# Altium PCB PCB.PcbDoc
Units mil, origin at the board's own origin, x right, y up, seen from the top; angles counter-clockwise.
Board outline 3858.27 x 3110.24 mil, 2 copper layers (Top Layer, Bottom Layer); 65 components, 47 nets, 203 pads, 35 vias.
Unrouted connection lines stored in the file: 1.
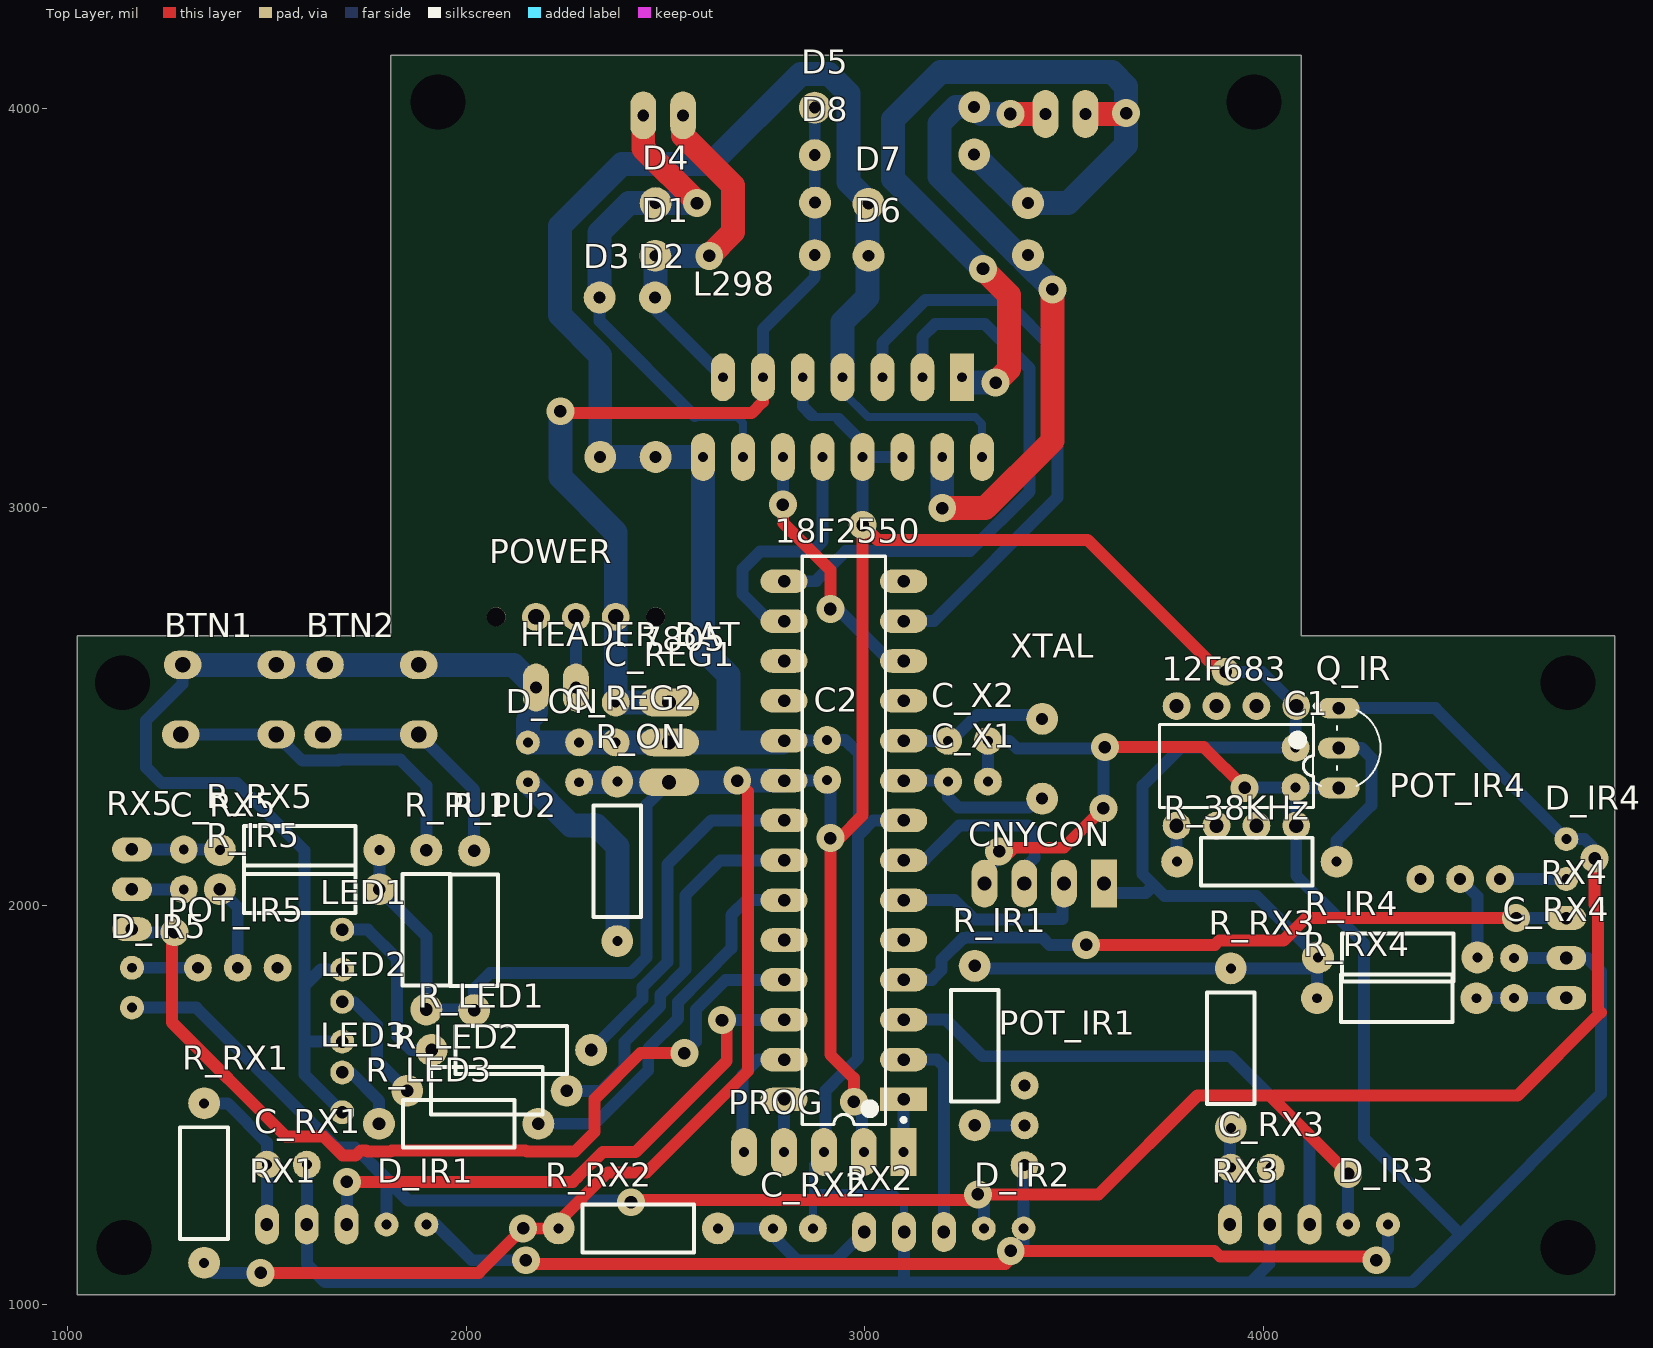
[diagram p0: Top Layer view]
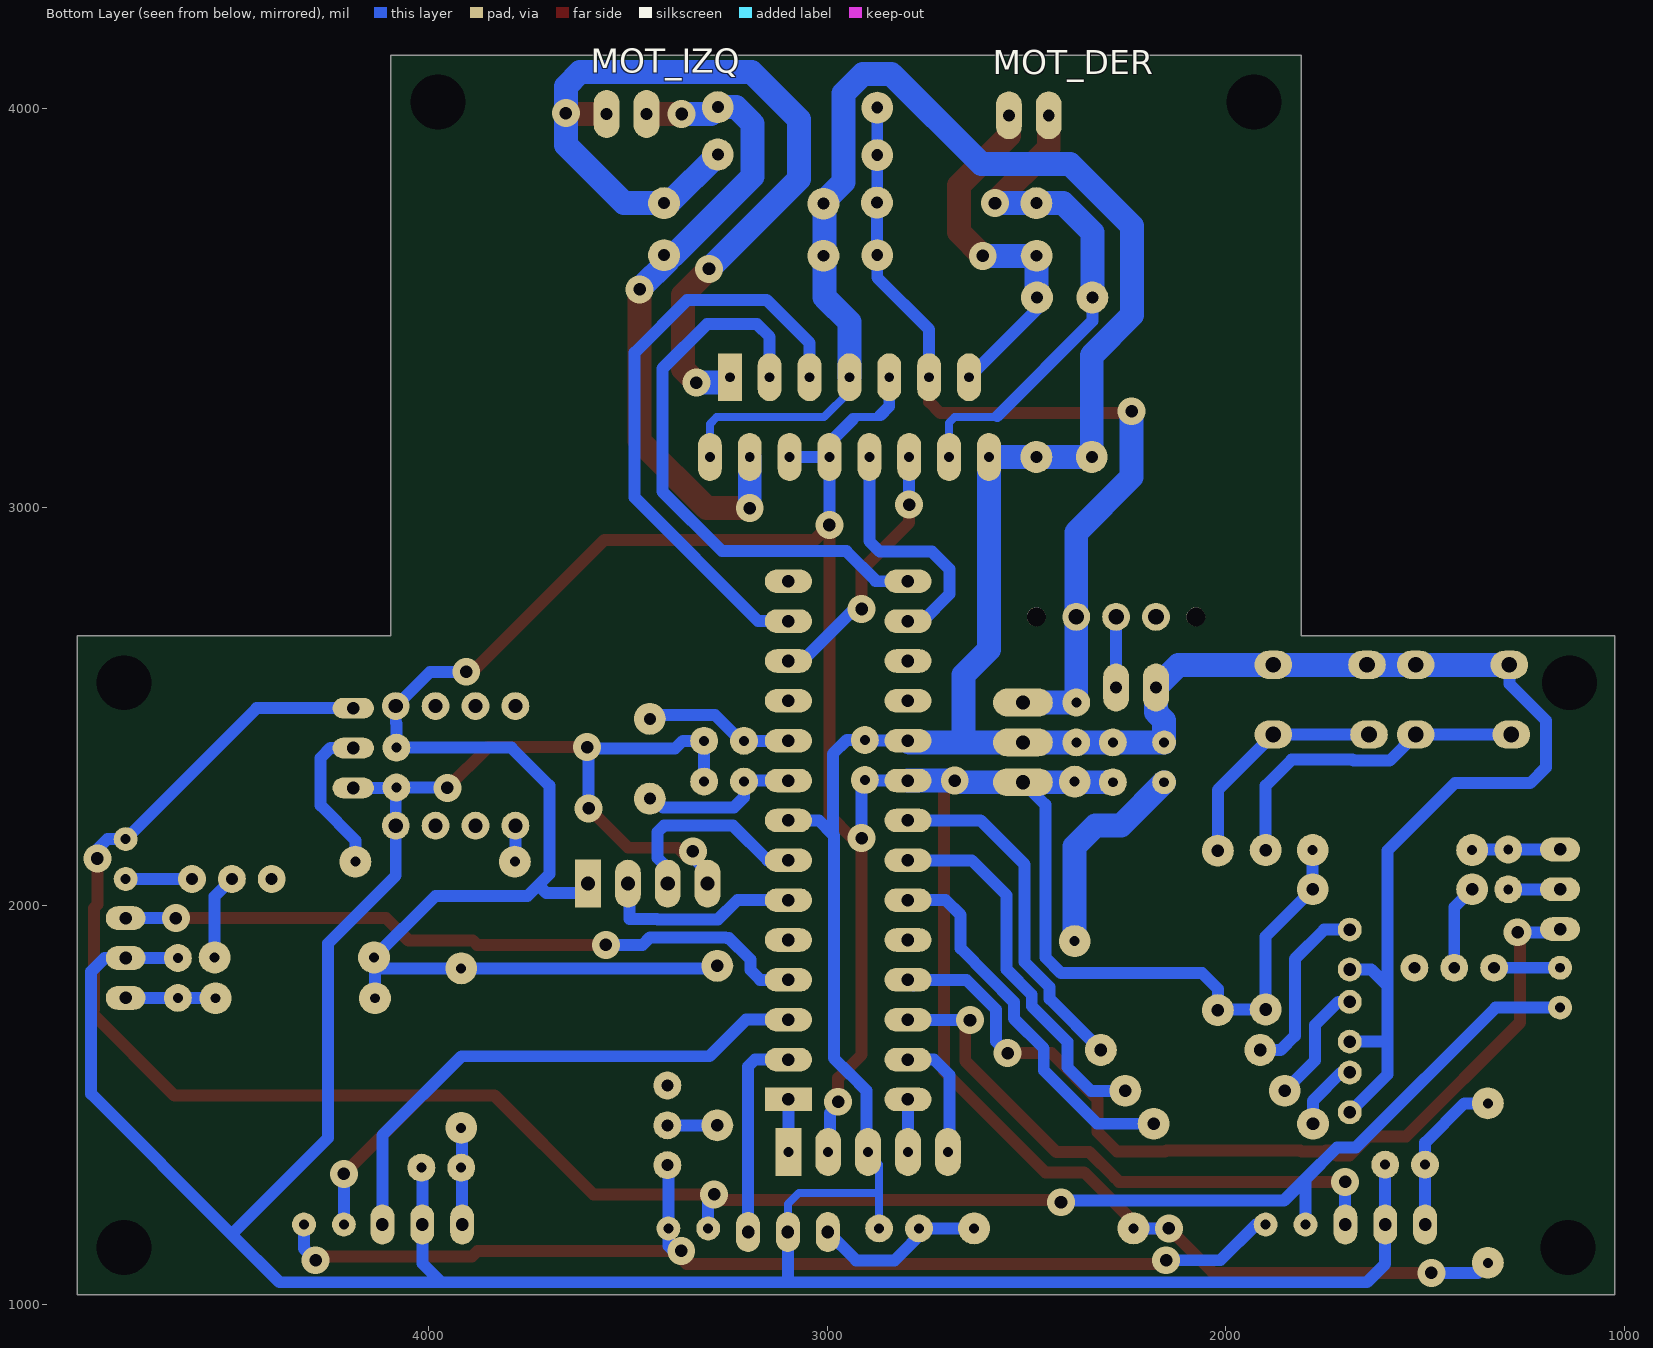
[diagram p1: Bottom Layer view, seen from below]
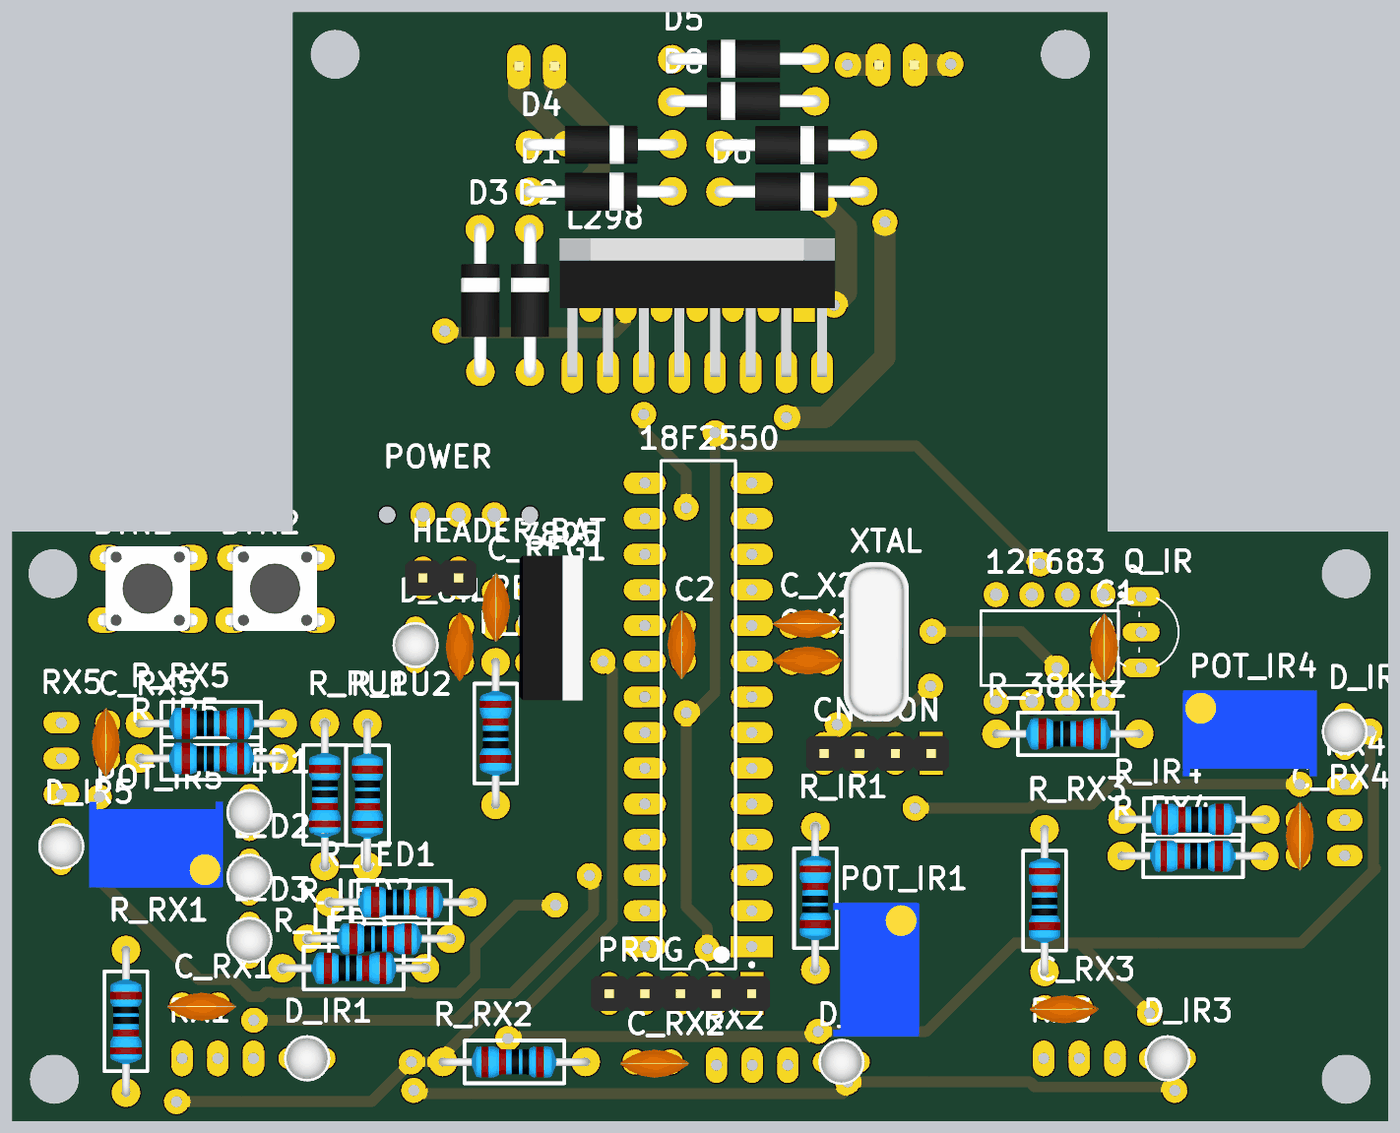
[diagram p2: 3D render of the assembled board from above, using the file's embedded part models]

## Layer stack, top to bottom
Top Solder: solder mask 0.4, Solder Resist, Dk 3.5
Top Layer: signal copper 1.4
Dielectric 1: dielectric 12.6, FR-4, Dk 4.8
Bottom Layer: signal copper 1.4
Bottom Solder: solder mask 0.4, Solder Resist, Dk 3.5

## Board outline
1023.62,1023.62 1023.62,2677.17 1811.02,2677.17 1811.02,4133.86 4094.49,4133.86 4094.49,2677.17 4881.89,2677.17 4881.89,1023.62

## Design rules (kind name [scope] priority, off if disabled: settings)
Clearance [All] p1: gap=15
ComponentClearance [All] p1: gap=0 collisioncheckmode=3 verticalgap=0 showdistances=FALSE
PolygonConnect [All] p1: connectstyle=Relief reliefconductorwidth=10 reliefentries=4 polygonreliefangle="90 Angle" airgapwidth=10
RoutingVias [All] p1: holewidth=31.5 width=50 viastyle="Through Hole" minholewidth=31.5 minwidth=50 maxholewidth=31.5 maxwidth=50
SolderMaskExpansion [All] p1: expansion=4
Width [All] p1: maxlimit=100 minlimit=20 preferedwidth=30
29 further rules are at their usual default settings.

## Components (designator, comment, footprint, x,y, rotation, side; value= is the part's Value field where it differs from the comment)
12F683 "PIC12F683-I/P" PDIP300-P8 3932.29,2350.46 r270 top
18F2550 "PIC18F2550-I/SP" SPDIP300-SP28 2947.37,2163.7 r180 top
7805 "LM7805" TO-220-STRAIGHT 2508.92,2509.45 r0 top
BTN1 "SWITCH" TACT_SWITCH-SMALL-4PIN 1503.62,2604.13 r180 top
BTN2 "SWITCH" TACT_SWITCH-SMALL-4PIN 1860.67,2604.13 r180 top
C1 "CAP-CER" CAP-CER 4080.76,2361.2 r90 top
C2 "CAP-CER" CAP-CER 2905.51,2350.39 r270 top
C_REG1 "CAP-CER" CAP-CER 2375.06,2474.45 r90 top
C_REG2 "CAP-CER" CAP-CER 2283.33,2344.45 r270 top
C_RX1 "CAP-CER" CAP-CER 1565,1350 r0 top
C_RX2 "CAP-CER" CAP-CER 2834.69,1190.16 r0 top
C_RX3 "CAP-CER" CAP-CER 3983.11,1342.52 r0 top
C_RX4 "CAP-CER" CAP-CER 4628.95,1833.5 r90 top
C_RX5 "CAP-CER" CAP-CER 1291.34,2075.94 r270 top
C_X1 "CAP-CER" CAP-CER 3243.66,2311.02 r180 top
C_X2 "CAP-CER" CAP-CER 3243.66,2413.39 r180 top
CNYCON "HEADER-4" HEADER-4-VERTICAL 3600,2055.12 r270 top
D1 "" DO-41 2699.38,3631.8 r180 top
D2 "" DO-41 2473.61,3350.5 r270 top
D3 "" DO-41 2334.72,3350.5 r270 top
D4 "" DO-41 2700.05,3763.75 r180 top
D5 "" DO-41 3049.38,4001.81 r0 top
D6 "" DO-41 3234.29,3631.8 r180 top
D7 "" DO-41 3234.29,3762.3 r180 top
D8 "" DO-41 3049.38,3882.78 r0 top
D_IR1 "LED" LED-3MM-YELLOW 1850,1200 r180 top
D_IR2 "LED" LED-3MM-YELLOW 3348.42,1190.15 r180 top
D_IR3 "LED" LED-3MM-YELLOW 4262.6,1200 r180 top
D_IR4 "LED" LED-3MM-YELLOW 4759.84,2116.79 r90 top
D_IR5 "LED" LED-3MM-YELLOW 1161.42,1794.09 r270 top
D_ON "LED" LED-3MM-RED#1 2154.59,2359.45 r90 top
HEADER_BAT "HEADER-2" HEADER-2-VERTICAL 2225.06,2547.24 r270 top
L298 "L298" MULTIWATT15 3344.22,3325.51 r270 top
LED1 "LED" LED-3MM-RED#2 1688.98,1889.76 r270 top
LED2 "LED" LED-3MM-RED#2 1688.98,1708.66 r270 top
LED3 "LED" LED-3MM-RED#2 1688.98,1531.5 r270 top
MOT_DER "HEADER-2" HEADER-2-VERTICAL 2494.14,3982.63 r270 bottom
MOT_IZQ "HEADER-2" HEADER-2-VERTICAL 3503.13,3985.94 r90 bottom
POT_IR1 "10K" MULTITURN 3440.94,1448.82 r0 top
POT_IR4 "10K" MULTITURN 4493.52,2106.79 r90 top
POT_IR5 "10K" MULTITURN 1426.77,1804.1 r270 top
POWER "SWITCH" ORT_SWITCH 2275.06,2724.41 r0 top
PROG "HEADER-5" HEADER-5-VERTICAL 3097.37,1381.89 r270 top
Q_IR "BC548x" TO92-EBC_BC548*(Primary) 4238.98,2395.28 r270 top
R_38KHz "RES" RES-AXIAL-400MIL 4183.46,2110.24 r180 top
R_IR1 "RES" RES-Axial-400mil 3275.59,1848.82 r270 top
R_IR4 "RES" RES-AXIAL-400MIL 4136.83,1869.93 r0 top
R_IR5 "RES" RES-Axial-400mil 1781.89,2040.94 r180 top
R_LED1 "RES" RES-Axial-400mil 2313.39,1637.8 r180 top
R_LED2 "RES" RES-Axial-400mil 2251.97,1535.43 r180 top
R_LED3 "RES" RES-Axial-400mil 2181.1,1452.76 r180 top
R_ON "RES" RES-AXIAL-400MIL 2379,2311.02 r270 top
R_PU1 "RES" RES-Axial-400mil 1900,1739.37 r90 top
R_PU2 "RES" RES-Axial-400mil 2019.68,1737.8 r90 top
R_RX1 "RES" RES-AXIAL-400MIL 1342.52,1103.94 r90 top
R_RX2 "RES" RES-AXIAL-400MIL 2231.5,1190.15 r0 top
R_RX3 "RES" RES-AXIAL-400MIL 3918.11,1842.52 r270 top
R_RX4 "RES" RES-AXIAL-400MIL 4134.47,1767.57 r0 top
R_RX5 "RES" RES-AXIAL-400MIL 1781.89,2139.37 r180 top
RX1 "TSSP58038" TSSP58038 1600,1200 r180 top
RX2 "TSSP58038" TSSP58038 3098.43,1181.1 r180 top
RX3 "TSSP58038" TSSP58038 4015.75,1200 r180 top
RX4 "TSSP58038" TSSP58038 4759.84,1868.5 r270 top
RX5 "TSSP58038" TSSP58038 1161.42,2040.94 r90 top
XTAL "CRYSTAL-OSC" HC-49/S 3444.88,2388.5 r270 top

## Footprints (in the part's own frame and the unit in brackets; to place one, negate y for a bottom-side part, rotate by r counter-clockwise, add the part's x,y. Pads: shape width x height; smd on the part's side, far side on the other; paste and mask are expansions set on the pad)
CAP-CER [mil]
  round 70 hole 25: 1(-65,0) 2(35,0)
  body extent -107,-44 87,34, height 207
DO-41 [mil]
  round 80 hole 30: A(224.99,1.45) K(-175,0)
  body extent -192,-52 242,55, height 107
HC-49/S [mil]
  round 80 hole 30: 1(-80,0) 2(120,0)
  body extent -203,-90 243,93, height 138
HEADER-2-VERTICAL [mil]
  oval 120x65 hole 30: 1(0,50) 2(0,-50)
  body extent -49,-100 49,100, height 336
HEADER-4-VERTICAL [mil]
  rect 120x65 hole 35.43: 1(0,0)
  oval 120x65 hole 35.43: 2(0,-100) 3(0,-200) 4(0,-300)
  body extent -49,-350 49,50, height 336
HEADER-5-VERTICAL [mil]
  rect 120x65 hole 25: 1(0,0)
  oval 120x65 hole 25: 2(0,-100) 3(0,-200) 4(0,-300) 5(0,-400)
  body extent -49,-450 49,50, height 336
LED-3MM-RED#1 [mil]
  round 60 hole 25: A(-50,0) K(50,0)
  body extent -66,-65 64,65, height 217
LED-3MM-RED#2 [mil]
  round 60 hole 31.5: A(-50,0) K(50,0)
  body extent -66,-65 64,65, height 217
LED-3MM-YELLOW [mil]
  round 60 hole 25: A(-50,0) K(50,0)
  body extent -66,-65 64,65, height 217
MULTITURN [mil]
  round 70 hole 30: 1(-40,100) 2(-40,0) 3(-40,-100)
  body extent -115,-187 125,188, height 455
MULTIWATT15 [mil]
  oval 120x60 hole 25: 1(200,-750) 2(0,-700) 3(200,-650) 4(0,-600) 5(200,-550) 6(0,-500) 7(200,-450) 8(0,-400) 9(200,-350) 10(0,-300) 11(200,-250) 12(0,-200) 13(200,-150) 15(200,-50)
  rect 120x60 hole 25: 14(0,-100)
  body extent -175,-786 214,-14, height 831
ORT_SWITCH [mm]
  round 1.778 hole 1: 1(0,0) 2(2.54,0) ""(-2.54,0)
  round 1.2 hole 1.2 unplated: ""(-5.08,0) ""(5.08,0)
PDIP300-P8 [mil] "DIP, 8-Leads, Row Spacing 7.62mm, Pitch 2.54mm, Body 9.5x6.6mm"
  round 70 hole 35.43: 1(-150,150) 2(-150,50) 3(-150,-50) 4(-150,-150) 5(150,-150) 6(150,-50) 7(150,50) 8(150,150)
  silkscreen extent -155,-193 104,206, body extent -140,-193 140,193, height 210
RES-AXIAL-400MIL [mil]
  round 80 hole 25: 1(0,0) 2(400,0)
  silkscreen extent 60,-60 340,60, body extent -12,-44 410,44, height 94
RES-Axial-400mil [mil]
  round 80 hole 31.5: 1(0,0) 2(400,0)
  silkscreen extent 60,-60 340,60, body extent -12,-44 410,44, height 94
SPDIP300-SP28 [mm] "DIP, 28-Leads, Row Spacing 7.62mm, Pitch 2.54mm, Body 34.9x6.8mm"
  rect 3x1.5 hole 0.8: 1(-3.81,16.51)
  oval 3x1.5 hole 0.8: 2(-3.81,13.97) 3(-3.81,11.43) 4(-3.81,8.89) 5(-3.81,6.35) 6(-3.81,3.81) 7(-3.81,1.27) 8(-3.81,-1.27) 9(-3.81,-3.81) 10(-3.81,-6.35) 11(-3.81,-8.89) 12(-3.81,-11.43) 13(-3.81,-13.97) 14(-3.81,-16.51) 15(3.81,-16.51) 16(3.81,-13.97) 17(3.81,-11.43) 18(3.81,-8.89) 19(3.81,-6.35) 20(3.81,-3.81) 21(3.81,-1.27) 22(3.81,1.27) 23(3.81,3.81) 24(3.81,6.35) 25(3.81,8.89) 26(3.81,11.43) 27(3.81,13.97) 28(3.81,16.51)
  silkscreen extent -3.94,-18.1 2.65,18.1, body extent -3.55,-18.1 3.55,18.1, height 5.08
TACT_SWITCH-SMALL-4PIN [mm]
  oval 2.4x1.8 hole 1: 1(-0.508,4.445) 1(5.588,4.445) 2(-0.508,0) 2(5.461,0)
  body extent -1.45,-0.79 6.53,5.21, height 5.15
TO92-EBC_BC548*(Primary) [mil]
  oval 52x104 hole 32: B(0,-50) C(-100,-50) E(100,-50)
  silkscreen extent -95,-115 95,55
TO-220-STRAIGHT [mil]
  oval 150x70 hole 35.43: 1(0,0) 2(0,-100) 3(0,-200)
  body extent -64,-305 114,101, height 661
TSSP58038 [mil]
  oval 60x100 hole 31.5: 1(-100,0) 2(0,0) 3(100,0)

## Part data
12F683: "Flash-Based 8-Bit CMOS Microcontroller with nanoWatt Technology, 2K (x14-Bit words) Program Memory, 384 Bytes Data Memory, 8-Pin PDIP, Industrial Temperature"
18F2550: "High Performance, Enhanced Flash, USB Microcontroller with nanoWatt Technology, 32K Flash, 28-Pin SPDIP, Industrial Temperature Range"
D1 D2 D3 D4 D5 D6 D7 D8: library part DIODE
POT_IR1 POT_IR4 POT_IR5: library part POT
Q_IR: library part BC548*, "Transistor Silicon Npn Ambient Rated To D3007, Bc5"

## Free pads (board coordinates)
  round 0 hole 137.8 unplated: ""(1137.8,2559.06) ""(1141.73,1141.73) ""(1929.13,4015.75) ""(3976.38,4015.75) ""(4763.78,1141.73) ""(4763.78,2559.06)

## Via types
v1: diameter 70, hole 31.5, Top Layer to Bottom Layer, 35 vias

## Nets (pads, with @x,y where several pads share a name; then routed paths per layer and width w, separated by ;. In a path a pad name is that pad's centre, name@x,y a point inside that pad or via, vN(x,y) a via of type N, cw(c..) or ccw(c..) an arc to the next point about the centre after c; other vN are vias at no path point)
38KHZ: 12F683.5 R_38KHz.2 | length 90.7
  Bottom Layer w30: 12F683.5 3782.29,2111.41 R_38KHz.2
BTN1: BTN1.1 R_PU1.2 | length 833
  Bottom Layer w30: BTN1.1@1283.62,2429.13 1523.62,2429.13 1589.05,2363.7 1679.58,2363.7 1682.02,2366.14 1834.65,2366.14 1900,2300.78 R_PU1.2
BTN2: BTN2.1 R_PU2.2 | length 588.9
  Bottom Layer w30: BTN2.1@1640.67,2429.13 1880.67,2429.13 2019.68,2290.12 R_PU2.2
CNY1: 18F2550.6 CNYCON.2 | length 524
  Bottom Layer w30: 18F2550.6 3225.53,2013.7 3274.11,1965.12 3425.89,1965.12 3427.03,1966.26 3496.06,1966.26 CNYCON.2@3496.06,2055.12 ; CNYCON.2@3500,2039.23 CNYCON.2
CNY2: 18F2550.7 CNYCON.3 | length 511
  Bottom Layer w30: 18F2550.7 3149.13,2113.7 3236.46,2201.02 3354.22,2201.02 3371.2,2201.02 3409.21,2201.02 3425.2,2185.04 3425.2,2119.07 3400,2093.87 CNYCON.3
DIR_D: 18F2550.16 L298.7 | length 636.3
  Bottom Layer w30: 18F2550.16 2760.92,2713.7 2693.32,2781.3 2693.32,2844.57 2736.98,2888.23 2766.5,2888.23 2868.13,2888.23 2894.22,2914.32 L298.7
DIR_I: 18F2550.15 L298.12 | length 1448.9
  Bottom Layer w30: 18F2550.15 2878.46,2813.7 2878.82,2814.06 2878.82,2816.4 2951.71,2889.29 3263.7,2889.29 3413.07,3038.66 3413.07,3347.35 3301.21,3459.21 3176.56,3459.21 3144.22,3426.88 L298.12
GND: 12F683.8 18F2550.8 18F2550.19 7805.2 BTN1.2 BTN2.2 C1.1 C2.1 C_REG1.1 C_REG2.1 C_RX1.2 C_RX2.2 C_RX3.2 C_RX4.2 C_RX5.2 C_X1.1 C_X2.1 CNYCON.4 D2.A D3.A D6.A D7.A D_ON.K HEADER_BAT.2 L298.1 L298.8 L298.15 LED1.K LED2.K LED3.K PROG.3 Q_IR.E RX1.2 RX2.2 RX3.2 RX4.2 RX5.2 | length 16762.2
  Top Layer w30: v1(3336.73,2136.02) 3340.68,2136.02 3352.85,2123.85 3374.11,2145.12 3499.45,2145.12 v1(3598.43,2244.09) ; v1(3602.36,2397.64) 3850.39,2397.64 v1(3952.76,2295.28)
  Bottom Layer w20: C_RX2.2 2869.77,1190.24 2869.77,1279.53 ; PROG.3 2897.37,1377.69 2869.77,1350.09 2869.77,1279.53 ; L298.8 2944.22,3289.36 3008.07,3225.51 3277.28,3225.51 3294.22,3208.56 L298.15 ; RX2.2 3098.43,1251.97 3070.87,1279.53 2869.77,1279.53
  Bottom Layer w30: RX5.2 C_RX5.2 ; BTN1.2@1288.62,2604.13 1288.62,2556.34 1196.85,2464.57 1196.85,2346.46 1236.22,2307.09 1425.2,2307.09 1594.49,2137.8 1594.49,1799.21 ; C_RX1.2 RX1.2 1600,1100.79 1645.67,1055.12 3098.43,1055.12 ; LED3.K 1594.49,1575.98 1594.49,1657.48 ; LED2.K 1595.67,1658.66 1594.49,1657.48 ; LED1.K 1635.04,1839.76 1594.49,1799.21 ; 18F2550.19@2793.12,2409.45 18F2550.19 C2.1@2916.72,2413.7 ; PROG.3 2901.43,1385.94 2901.43,1535.86 2943.44,1577.87 2944.02,1577.87 2983.39,1617.24 2983.39,2176.3 2985.51,2178.43 ; C2.1 2950.75,2415.39 2985.51,2380.63 2985.51,2178.43 ; 18F2550.8 3020.79,2213.7 2985.51,2178.43 ; RX2.2 3098.43,1055.12 ; CNYCON.4 3300,2083.46 3343.9,2127.36 3336.73,2134.53 v1(3336.73,2136.02) ; C_X1.1 C_X2.1 3362.2,2413.39 3381.89,2393.7 v1@3598.43,2393.7 ; v1(3598.43,2244.09) v1@3598.43,2393.7 ; v1(3602.36,2397.64) v1@3598.43,2393.7 ; v1(3952.76,2295.28) 3953.68,2296.2 C1.1 C1.1@4081.68,2295.28 ; C_RX3.2@4015.75,1340.16 RX3.2 4015.75,1102.36 3968.5,1055.12 ; Q_IR.E C1.1@4081.68,2295.28 ; C_RX4.2 RX4.2 4812.6,1868.5 4846.46,1834.65 4846.46,1527.56 4492.13,1173.23 ; 1594.49,1657.48 1594.49,1799.21 ; 3098.43,1055.12 3968.5,1055.12 ; 3968.5,1055.12 4374.02,1055.12 4492.13,1173.23 ; C1.1@4081.68,2295.28 4082.29,2294.67 12F683.8 4082.29,2075.19 4251.97,1905.51 4251.97,1417.32 4492.13,1177.17 4492.13,1173.23
  Bottom Layer w60: BTN1.2@1288.62,2604.13 1523.62,2604.13 2118.17,2604.13 HEADER_BAT.2 2175.06,2485.04 2154.59,2464.57 D_ON.K 7805.2 2657.48,2409.45 ; 18F2550.19@2793.12,2409.45 2657.48,2409.45 ; L298.8 2944.22,3463.78 3006.65,3526.2 3006.65,3768.03 2959.38,3815.3 2959.38,4037.02 2909.59,4086.81 2839.17,4086.81 2613.14,3860.78 2390.79,3860.78 2234.74,3704.72 2234.74,3481.67 2336.17,3380.24 D3.A D2.A L298.1 2594.22,2642 2657.48,2578.74 2657.48,2409.45
IR1: 18F2550.26 RX1.1 | length 1427.8
  Top Layer w30: v1(1700.78,1307.08) 2267.71,1307.08 2278.74,1318.11 2342.52,1381.89 2425.2,1381.89 2653.54,1610.24 v1@2653.54,1692.91
  Bottom Layer w30: RX1.1 1700.78,1200.78 v1(1700.78,1307.08) ; v1(2641.73,1712.6) 2788.39,1712.6 2792.33,1708.66 18F2550.26
IR2: 18F2550.2 RX2.1 | length 523.8
  Bottom Layer w30: 18F2550.2 3181.57,1613.7 3198.43,1596.85 RX2.1
IR3: 18F2550.3 RX3.1 | length 1362.2
  Bottom Layer w30: 18F2550.3 3203.62,1713.7 3295.28,1622.05 3917.32,1622.05 4115.75,1423.62 RX3.1
IR4: 18F2550.4 RX4.1 | length 1753.4
  Top Layer w30: v1(3555.12,1901.57) 3878.17,1901.57 3889.12,1912.52 4050.32,1912.52 4106.3,1968.5 v1(4633.86,1968.5)
  Bottom Layer w30: 18F2550.4 3168.03,1813.7 3192.91,1838.58 3192.91,1865.14 3246.6,1918.82 3251.89,1918.82 ; 3255.47,1920.12 3444.53,1920.12 3463.07,1901.57 v1(3555.12,1901.57) ; v1(4633.86,1968.5) RX4.1
IR5: 18F2550.25 RX5.1 | length 2315.6
  Top Layer w30: v1(1267.72,1933.07) 1261.77,1927.13 1261.77,1706.73 1547.24,1421.26 1641.73,1421.26 1689.88,1373.11 1722.78,1373.11 1735.5,1385.83 1749.04,1385.83 1752.11,1382.76 1810.1,1382.76 1813.17,1385.83 2149.04,1385.83 2152.11,1382.76 2272.52,1382.76 2321.97,1432.2 2321.97,1514.88 2437.01,1629.92 v1(2547.24,1629.92)
  Bottom Layer w30: RX5.1 1169.29,1933.07 v1(1267.72,1933.07) ; v1(2547.24,1629.92) 2576.73,1659.4 2576.73,1739.52 2650.91,1813.7 18F2550.25 18F2550.25@2782.88,1799.21
LED1: 18F2550.21 R_LED1.1 | length 883.1
  Bottom Layer w30: R_LED1.1 2441.73,1766.14 2441.73,1795.44 2504.6,1858.31 2504.6,2103.03 2615.28,2213.7 18F2550.21
LED2: 18F2550.22 R_LED2.1 | length 948.7
  Bottom Layer w30: R_LED2.1 2338.58,1535.43 2397.64,1594.49 2397.64,1658.41 2486.73,1747.5 2486.73,1776.8 2549.6,1839.67 2549.6,2025.98 2637.32,2113.7 18F2550.22
LED3: 18F2550.23 R_LED3.1 | length 954.7
  Bottom Layer w30: R_LED3.1 2322.83,1452.76 2456.69,1586.61 2456.69,1641.73 2531.73,1716.77 2531.73,1758.16 2594.6,1821.03 2594.6,1821.99 2665.35,1892.74 2665.35,1976.38 2702.68,2013.7 18F2550.23
NetC_RX1_1: C_RX1.1 R_RX1.2 RX1.3 | length 403.8
  Bottom Layer w30: R_RX1.2 1401.57,1503.94 1500,1405.51 C_RX1.1 RX1.3
NetC_RX2_1: C_RX2.1 R_RX2.2 RX2.3 | length 429.5
  Bottom Layer w30: R_RX2.2 2750.79,1190.16 2830.79,1110.16 2927.48,1110.16 RX2.3
NetC_RX3_1: C_RX3.1 R_RX3.2 RX3.3 | length 243.5
  Bottom Layer w30: RX3.3 3915.75,1440.16 R_RX3.2
NetC_RX4_1: C_RX4.1 R_RX4.2 RX4.3 | length 225.8
  Bottom Layer w30: R_RX4.2 4535.4,1768.5 C_RX4.1 RX4.3
NetC_RX5_1: C_RX5.1 R_RX5.2 RX5.3 | length 221.1
  Bottom Layer w30: RX5.3 C_RX5.1 1380.31,2140.94 R_RX5.2
NetD1_A: D1.A D2.K L298.2 MOT_DER.2 | length 940.2
  Top Layer w30: MOT_DER.2@2544.14,3931.95 MOT_DER.2
  Top Layer w60: MOT_DER.2@2544.14,3931.95 2669.18,3806.91 2669.18,3689.55 v1(2609.75,3630.11)
  Bottom Layer w30: D2.K@2474.39,3526.28 D2.K 2473.61,3496.13 L298.2 ; D1.A D1.A@2474.62,3630.11
  Bottom Layer w60: D2.K@2474.39,3526.28 D1.A ; D1.A@2474.62,3630.11 v1(2609.75,3630.11)
NetD3_K: D3.K D4.A L298.3 MOT_DER.1 | length 1320.3
  Top Layer w60: MOT_DER.1 2444.14,3899.55 2578.91,3764.78 v1(2578.91,3762.52)
  Bottom Layer w20: 2575.75,3225.51 2680,3225.51 2694.22,3211.29 L298.3
  Bottom Layer w30: D3.K 2334.72,3466.54 2573.3,3227.96 ; v1@2578.68,3762.3 v1(2578.91,3762.52)
  Bottom Layer w60: D3.K 2334.72,3688.59 2408.43,3762.3 D4.A v1@2578.68,3762.3
NetD5_A: D5.A D6.K L298.13 MOT_IZQ.2 | length 1702.7
  Top Layer w60: v1(3194.22,2997.37) 3302.15,2997.37 3470.56,3165.78 v1(3470.56,3545.85) ; v1(3365.06,3985.94) MOT_IZQ.2
  Bottom Layer w60: v1(3194.22,2997.37) L298.13 ; v1(3365.06,3985.94) 3291.69,3985.94 D5.A 3228.68,4003.26 3187,3961.58 3187,3828.96 3384.17,3631.8 D6.K 3397.35,3619.85 3470.56,3546.64 v1(3470.56,3545.85)
NetD7_K: D7.K D8.A L298.14 MOT_IZQ.1 | length 2275.4
  Top Layer w60: v1(3296.52,3597.33) 3362.03,3531.82 3362.03,3346.1 v1(3328.07,3312.14) ; MOT_IZQ.1 3653.19,3985.94 v1(3655.44,3988.2)
  Bottom Layer w60: L298.14 3257.59,3312.14 v1(3328.07,3312.14) ; D8.A 3396.31,3762.3 D7.K 3510.04,3762.3 3655.44,3907.7 v1(3655.44,3988.2) 3655.44,4055.26 3619.76,4090.94 3189.37,4090.94 3070.87,3972.44 3070.87,3822.99 v1(3296.52,3597.33)
NetD_IR1_A: D_IR1.A D_IR2.A D_IR3.A POT_IR1.3 | length 2831.8
  Top Layer w30: v1(2149.61,1110.24) 2149.61,1101.1 3353.07,1101.1 3366.14,1114.17 v1(3366.14,1133.86) 3877.04,1133.86 3890.9,1120 4273.7,1120 v1(4283.46,1110.24)
  Bottom Layer w30: D_IR1.A 1923.63,1200 2013.39,1110.24 v1(2149.61,1110.24) ; v1(3366.14,1133.86) 3366.14,1114.17 3398.43,1146.46 D_IR2.A POT_IR1.3@3398.43,1346.46 ; v1(4283.46,1110.24) 4312.6,1139.37 D_IR3.A
NetD_IR1_K: D_IR1.K D_IR2.K D_IR3.K D_IR4.K D_IR5.K Q_IR.C | length 5899.7
  Top Layer w30: v1(2413.39,1255.91) 2418.58,1261.1 3268.98,1261.1 v1(3283.46,1275.59) 3586.61,1275.59 3834.65,1523.62 4015.75,1523.62 ; v1(4212.6,1326.77) 4015.75,1523.62 ; v1(4830.71,2118.11) 4830.71,2002.49 4839.84,1993.36 4839.84,1738.9 4846.46,1732.28 4637.8,1523.62 4015.75,1523.62
  Bottom Layer w30: D_IR5.K 1322.83,1744.09 1673.23,1393.7 1720.47,1393.7 1800,1314.17 ; D_IR1.K 1800,1314.17 ; v1(2413.39,1255.91) 2409.14,1260.15 1854.02,1260.15 1800,1314.17 ; v1(3283.46,1275.59) 3298.42,1260.63 D_IR2.K ; Q_IR.C 4431.35,2495.28 D_IR4.K 4805.65,2166.79 4830.71,2141.73 v1(4830.71,2118.11) ; D_IR3.K v1(4212.6,1326.77)
NetD_IR4_A: D_IR4.A POT_IR4.3 | length 166.3
  Bottom Layer w30: POT_IR4.3 D_IR4.A
NetD_IR5_A: D_IR5.A POT_IR5.3 | length 165.4
  Bottom Layer w30: D_IR5.A POT_IR5.3
NetD_ON_A: D_ON.A R_ON.2 | length 528.6
  Bottom Layer w60: D_ON.A 2263.25,2200.79 2326.77,2200.79 2379,2148.56 R_ON.2
NetHEADER_BAT_1: HEADER_BAT.1 POWER.1 | length 177.2
  Bottom Layer w30: HEADER_BAT.1 POWER.1
NetLED1_A: LED1.A R_LED1.2 | length 462.5
  Bottom Layer w30: LED1.A 1753.15,1939.77 1826.77,1866.14 1826.77,1673.23 1862.2,1637.8 R_LED1.2
NetLED2_A: LED2.A R_LED2.2 | length 307.6
  Bottom Layer w30: LED2.A 1717.71,1758.66 1775.59,1700.79 1775.59,1611.81 R_LED2.2
NetLED3_A: LED3.A R_LED3.2 | length 179.1
  Bottom Layer w30: LED3.A 1709.84,1581.5 1781.1,1510.24 R_LED3.2
NetPOT_IR1_2: POT_IR1.2 R_IR1.2 | length 125.4
  Bottom Layer w30: R_IR1.2 POT_IR1.2
NetPOT_IR4_2: POT_IR4.2 R_IR4.2 | length 214.8
  Bottom Layer w30: POT_IR4.2 4536.83,2023.48 R_IR4.2
NetPOT_IR5_2: POT_IR5.2 R_IR5.2 | length 215.4
  Bottom Layer w30: R_IR5.2 1426.77,1996.06 POT_IR5.2
NetQ_IR_B: Q_IR.B R_38KHz.1 | length 388.9
  Bottom Layer w30: R_38KHz.1 4183.46,2163.78 4270.98,2251.29 4270.98,2370.76 4246.46,2395.28 Q_IR.B
PGC: 18F2550.27 PROG.5 | length 315
  Bottom Layer w30: PROG.5 2693.32,1385.94 2693.32,1575.21 2731.81,1613.7 18F2550.27
PGD: 18F2550.28 PROG.4 | length 131.8
  Bottom Layer w30: PROG.4 18F2550.28
PWM_D: 18F2550.12 L298.5 | length 668.8
  Top Layer w30: v1(2794.22,3005.86) 2794.22,2961.06 2913.38,2841.9 v1(2913.38,2744.09)
  Bottom Layer w30: v1(2794.22,3005.86) L298.5 ; v1(2913.38,2744.09) 2932.06,2744.09 3062.45,2613.7 18F2550.12
PWM_I: 18F2550.13 L298.10 | length 1501.8
  Bottom Layer w30: L298.10 3044.22,3411.73 3151.7,3519.21 3351.08,3519.21 3482.99,3387.3 3482.99,3023.73 3172.96,2713.7 18F2550.13
VBAT: 7805.1 C_REG1.2 D1.K D4.K D5.K D8.K L298.4 POWER.2 | length 2236.1
  Top Layer w30: v1(2236.22,3240.16) 2240.87,3235.51 2715.83,3235.51 2744.22,3263.91 L298.4
  Bottom Layer w30: L298.4 2744.22,3445.4 2874.38,3575.56 D1.K 2875.05,3632.46 D4.K 2874.38,3764.42 D8.K D5.K
  Bottom Layer w60: v1(2236.22,3240.16) 2236.22,3074.8 2375.06,2935.96 POWER.2 C_REG1.2 7805.1
VCC: 12F683.1 18F2550.20 7805.3 C1.2 C2.2 C_REG2.2 CNYCON.1 L298.6 L298.9 L298.11 PROG.2 R_IR1.1 R_IR4.1 R_IR5.1 R_ON.1 R_PU1.1 R_PU2.1 R_RX1.1 R_RX2.1 R_RX3.1 R_RX4.1 R_RX5.1 | length 10632.9
  Top Layer w30: v1(1484.25,1078.74) 2031.5,1078.74 v1(2142.91,1190.15) R_RX2.1 2231.5,1206.92 2355.17,1330.59 2452.64,1330.59 2706.73,1584.68 2706.73,2286.82 v1(2679.84,2313.7) ; v1(2972.43,1507.87) 2972.43,1566.94 2913.39,1625.98 v1(2913.39,2169.29) 2937.01,2169.29 2994.22,2226.51 v1(2994.22,2954.85) 3031.76,2917.32 3559.06,2917.32 3889.77,2586.61 v1(3905.5,2586.61)
  Bottom Layer w20: 2866.2,3230.51 2871.2,3225.51 2930.29,3225.51 2935.29,3220.51
  Bottom Layer w30: R_RX1.1 1367.72,1078.74 v1(1484.25,1078.74) ; R_RX5.1 R_IR5.1 1900,1922.83 R_PU1.1 2018.11,1739.37 R_PU2.1 2019.68,1791.34 2059.06,1830.71 2413.36,1830.71 2452.76,1870.11 2452.76,2253.29 7805.3 ; v1(2142.91,1190.15) R_RX2.1 ; v1@2675.59,2309.45 v1(2679.84,2313.7) ; 18F2550.20 C2.2@2916.72,2313.7 ; L298.6 2844.22,3252.49 2866.2,3230.51 ; v1(2913.39,2169.29) 2913.39,2310.37 C2.2@2916.72,2313.7 ; C2.2@2918.05,2315.03 C2.2@2916.72,2313.7 ; 2935.29,3220.51 2994.22,3161.58 L298.9 ; v1(2972.43,1507.87) 2972.43,1500.01 2993.32,1479.12 2993.32,1385.94 PROG.2 ; v1(2994.22,2954.85) L298.9 ; L298.11 L298.9 ; R_IR1.1 3281.89,1842.52 R_RX3.1 R_IR4.1@4134.47,1842.52 ; CNYCON.1@3600,2023.62 3607.87,2031.5 3704.72,2031.5 3724.41,2051.18 ; v1(3905.5,2586.61) 3996.14,2586.61 12F683.1 4082.29,2458.73 4080.76,2457.2 C1.2 3792.26,2396.2 3696.85,2300.79 3696.85,2078.74 3724.41,2051.18 ; R_RX4.1 R_IR4.1@4134.47,1842.52 ; 3724.41,2051.18 3751.97,2023.62 3983.14,2023.62 R_IR4.1 4134.47,1867.57 R_IR4.1@4134.47,1842.52
  Bottom Layer w60: C_REG2.2 7805.3 v1@2675.59,2309.45 ; v1(2679.84,2313.7) 18F2550.20
VPP: 18F2550.1 PROG.1 | length 131.8
  Bottom Layer w30: PROG.1 18F2550.1
XTAL1: 18F2550.9 C_X1.2 XTAL.2 | length 407.9
  Bottom Layer w30: 18F2550.9 3205.98,2313.7 C_X1.2 3208.66,2271.65 3234.29,2246.02 3335.59,2246.02 3389.84,2246.02 3411.38,2246.02 3433.86,2268.5 XTAL.2
XTAL2: 18F2550.10 C_X2.2 XTAL.1 | length 384.4
  Bottom Layer w30: 18F2550.10 3097.69,2413.39 C_X2.2 3216.74,2413.39 3281.74,2478.39 3444.88,2478.39 XTAL.1
pads on no net: 12F683.2 12F683.3 12F683.4 12F683.6 12F683.7 18F2550.5 18F2550.11 18F2550.14 18F2550.17 18F2550.18 18F2550.24 POT_IR1.1 POT_IR4.1 POT_IR5.1 POWER.

## Silkscreen, mask and mechanical layers (free items; w line width, h text height)
Mechanical 15:
  the board outline again, w10